# Altium PCB AICat V1.5 双面板 板厚1.6mm.PcbDoc (part 4 of 6)
Units mil, origin at the board's own origin, x right, y up, seen from the top; angles counter-clockwise.
Board outline 2778 x 2104 mil, 2 copper layers (Top Layer, Bottom Layer); 123 components, 84 nets, 332 pads, 256 vias.
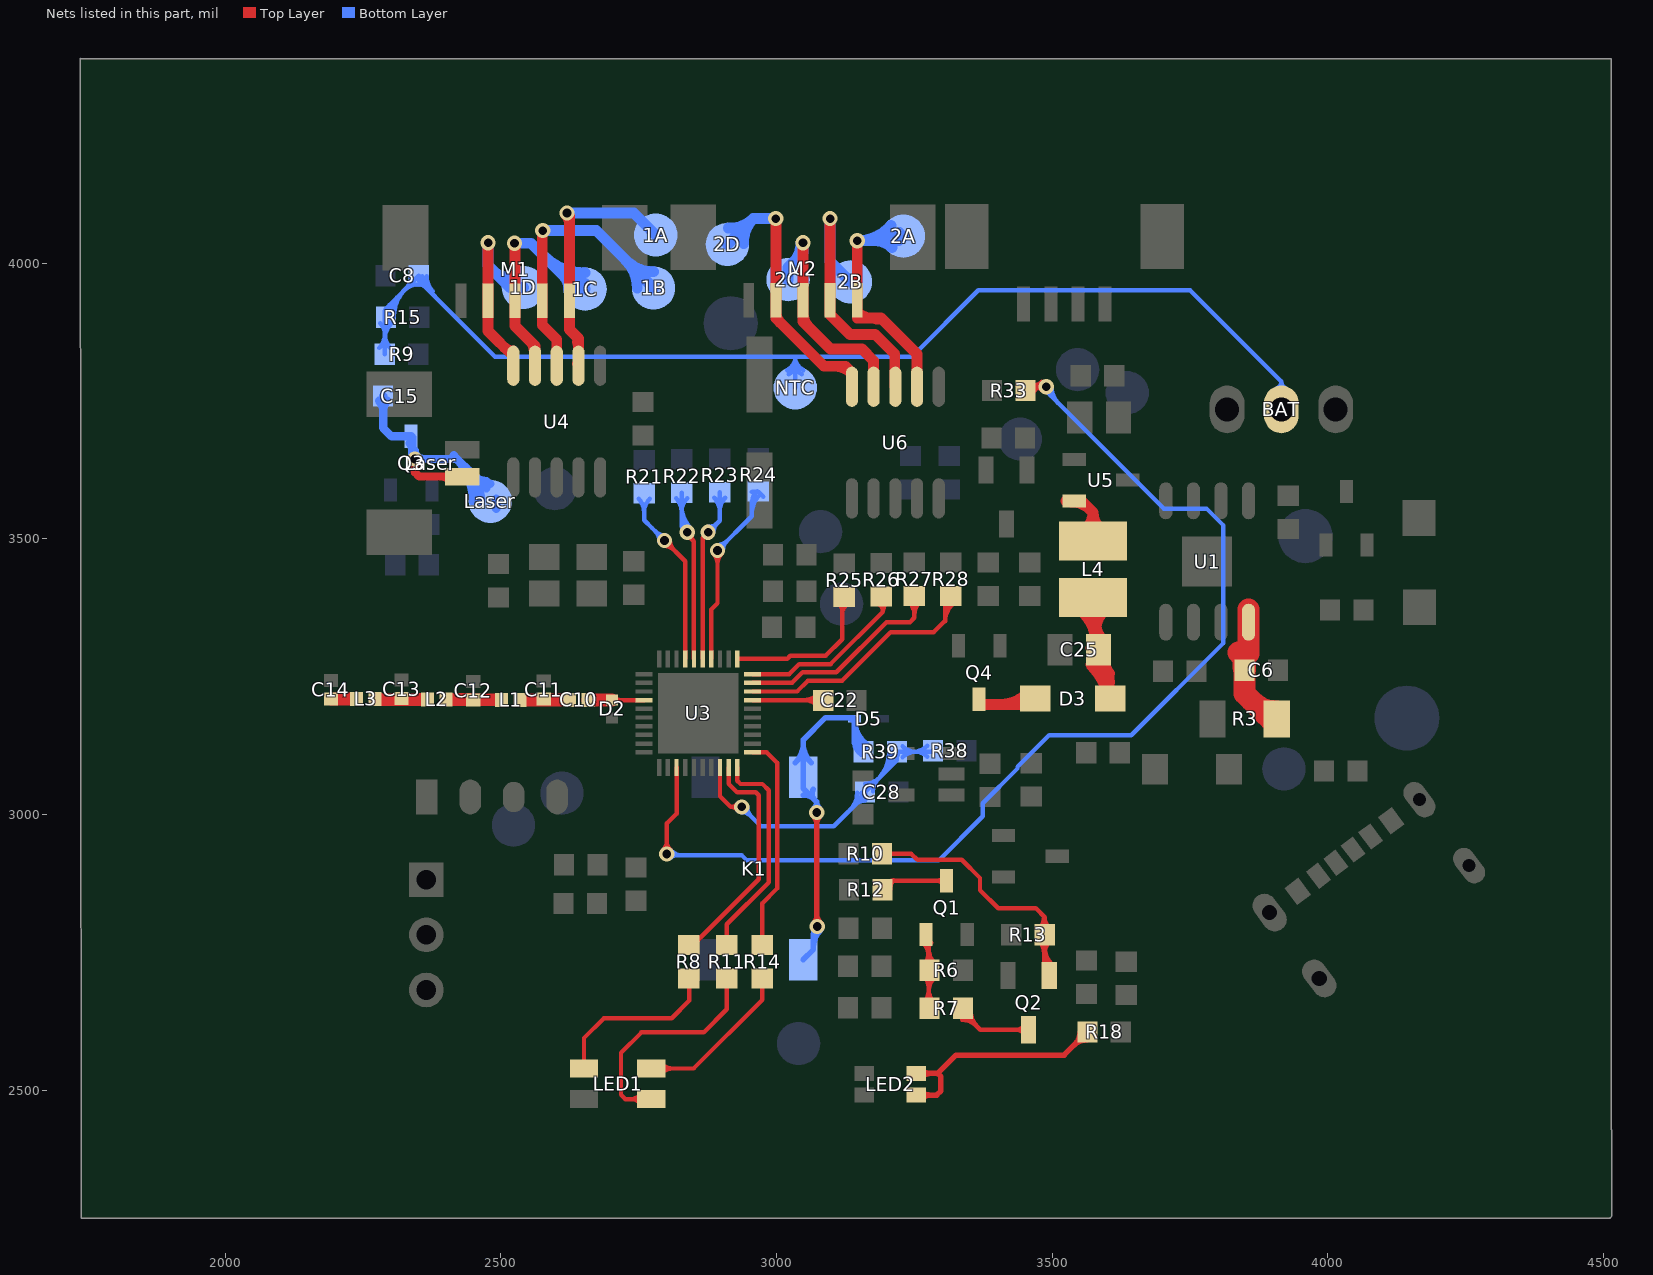
[diagram p4: the nets of this part, all layers, seen from the top]

## Via types
v1: diameter 27.56, hole 15.75, Top Layer to Bottom Layer, tented both sides, 256 vias

## Nets (pads, with @x,y where several pads share a name; then routed paths per layer and width w, separated by ;. In a path a pad name is that pad's centre, name@x,y a point inside that pad or via, vN(x,y) a via of type N, cw(c..) or ccw(c..) an arc to the next point about the centre after c; other vN are vias at no path point) (continued)
KEY: C28.2 R38.1 R39.2 U3.8 | length 1670.4
  Top Layer w8: U3.8@2897.52,3085.51 2897.52,3033.48 2917,3014 ; v1(2937,3014) 2917,3014 ; 2917,3014 cw(c2917,2998.44) v1@2929.28,3007.99 ; 2917,3014 ccw(c2917,3029.56) v1@2929.28,3020.01 ; 2917,3014 cw(c2917,2998.44) v1@2929.28,3007.99 ; 2917,3014 ccw(c2917,3029.56) v1@2929.28,3020.01 ; 2917,3014 ccw(c2917,3029.56) v1@2929.28,3020.01 ; 2917,3014 cw(c2917,2998.44) v1@2929.28,3007.99
  Bottom Layer w8: v1(2937,3014) 2972,2979 3104,2979 3160.69,3035.69 C28.2@3160.69,3041 3218.32,3098.63 R39.2@3218.32,3114 3281.69,3114 R38.1@3283.69,3116 ; 3133.2,3008.2 ccw(c3101.39,3040.02) C28.2@3146.38,3040.02 ; 3143.65,3018.65 cw(c3160.69,3001.62) C28.2@3160.69,3025.71 ; C28.2@3146.86,3021.86 ccw(c3128.7,3040.02) C28.2@3154.38,3040.02 ; v1@2937,3004.22 cw(c2937,2980.61) 2953.69,2997.31 ; v1@2937,3004.22 cw(c2937,2980.61) 2953.69,2997.31 ; v1@2937,3004.22 cw(c2937,2980.61) 2953.69,2997.31 ; v1@2946.78,3014 ccw(c2970.39,3014) 2953.69,2997.31 ; v1@2946.78,3014 ccw(c2970.39,3014) 2953.69,2997.31 ; v1@2946.78,3014 ccw(c2970.39,3014) 2953.69,2997.31 ; C28.2@3160.69,3056.29 ccw(c3160.69,3093.21) 3186.79,3067.1 ; C28.2@3160.69,3056.29 ccw(c3160.69,3093.21) 3186.79,3067.1 ; C28.2@3160.69,3056.29 ccw(c3160.69,3093.21) 3186.79,3067.1 ; C28.2@3174.99,3041.98 cw(c3207.16,3041.98) 3184.41,3064.73 ; C28.2@3174.99,3041.98 cw(c3207.16,3041.98) 3184.41,3064.73 ; C28.2@3174.99,3041.98 cw(c3207.16,3041.98) 3184.41,3064.73 ; 3183.72,3064.03 ccw(c3134.74,3113.02) R39.2@3204.01,3113.02 ; 3183.72,3064.03 ccw(c3134.74,3113.02) R39.2@3204.01,3113.02 ; 3183.72,3064.03 ccw(c3134.74,3113.02) R39.2@3204.01,3113.02 ; 3197.38,3077.69 ccw(c3162.05,3113.02) R39.2@3212.01,3113.02 ; 3197.38,3077.69 ccw(c3162.05,3113.02) R39.2@3212.01,3113.02 ; 3197.38,3077.69 ccw(c3162.05,3113.02) R39.2@3212.01,3113.02 ; 3211.03,3091.35 ccw(c3189.37,3113.02) R39.2@3220.01,3113.02 ; 3211.03,3091.35 ccw(c3189.37,3113.02) R39.2@3220.01,3113.02 ; 3211.03,3091.35 ccw(c3189.37,3113.02) R39.2@3220.01,3113.02 ; R39.2@3228.43,3103.88 cw(c3252.86,3079.46) 3252.86,3114 ; R39.2@3228.43,3103.88 cw(c3252.86,3079.46) 3252.86,3114 ; R39.2@3228.43,3103.88 cw(c3252.86,3079.46) 3252.86,3114 ; R39.2@3228.43,3124.12 ccw(c3252.86,3148.54) 3252.86,3114 ; R39.2@3228.43,3124.12 ccw(c3252.86,3148.54) 3252.86,3114 ; R39.2@3228.43,3124.12 ccw(c3252.86,3148.54) 3252.86,3114 ; 3246.69,3114 ccw(c3246.69,3152.01) R38.1@3273.57,3125.13 ; 3246.69,3114 ccw(c3246.69,3152.01) R38.1@3273.57,3125.13 ; 3246.69,3114 ccw(c3246.69,3152.01) R38.1@3273.57,3125.13 ; 3251.6,3114 cw(c3251.6,3082.93) R38.1@3273.57,3104.9 ; 3251.6,3114 cw(c3251.6,3082.93) R38.1@3273.57,3104.9 ; 3251.6,3114 cw(c3251.6,3082.93) R38.1@3273.57,3104.9 ; 3142.69,3017.69 cw(c3156.22,3017.69) 3149.64,3029.51 ccw(c3156.22,3017.69) 3142.69,3017.69
LED_B: R8.2 U3.9 | length 421.7
  Top Layer w8: R8.2@2841,2763.32 2848.32,2763.32 2968,2883 2968,3035 2962.44,3040.56 2928.44,3040.56 2913.27,3055.73 U3.9@2913.27,3085.51
LED_G: R11.2 U3.10 | length 398.6
  Top Layer w8: R11.2@2910,2765.32 2910,2801 2986,2877 2986,3044 2974.44,3055.56 2934.66,3055.56 2929.02,3061.2 U3.10@2929.02,3085.51
LED_R: R14.2 U3.11 | length 392.2
  Top Layer w8: U3.11@2956.55,3113.04 2981.96,3113.04 3001,3094 3001,2866 2974,2839 R14.2@2974,2765.32
LEIDA_CON: R33.2 U3.3 | length 3050.2
  Top Layer w8: v1(2801,2928.63) 2801,2984 2818.78,3001.78 U3.3@2818.78,3085.51 ; R33.2@3437.32,3777 3438.32,3778 v1@3488,3778 ; R33.2@3460.56,3778 cw(c3460.56,3747.56) v1@3482.08,3769.08 ; 3470.22,3778 ccw(c3470.22,3794.78) v1@3482.08,3782.92 ; v1@3486,3776 v1@3488,3778 ; v1@2794.08,2935.55 ccw(c2777.39,2952.24) 2801,2952.24 ; v1@2794.08,2935.55 ccw(c2777.39,2952.24) 2801,2952.24 ; v1@2794.08,2935.55 ccw(c2777.39,2952.24) 2801,2952.24 ; 2801,2952.24 ccw(c2824.61,2952.24) v1@2807.92,2935.55 ; 2801,2952.24 ccw(c2824.61,2952.24) v1@2807.92,2935.55 ; 2801,2952.24 ccw(c2824.61,2952.24) v1@2807.92,2935.55 ; R33.2@3447.29,3766.11 cw(c3471.63,3747.16) 3471.63,3778 ; R33.2@3447.29,3766.11 cw(c3471.63,3747.16) 3471.63,3778 ; R33.2@3447.29,3766.11 cw(c3471.63,3747.16) 3471.63,3778 ; R33.2@3453.6,3761.19 cw(c3488,3734.4) v1@3488,3778 ; R33.2@3453.6,3761.19 cw(c3488,3734.4) v1@3488,3778 ; R33.2@3453.6,3761.19 cw(c3488,3734.4) v1@3488,3778 ; R33.2@3464.39,3778 cw(c3464.39,3754.39) v1@3481.08,3771.08 ; R33.2@3464.39,3778 ccw(c3464.39,3801.61) v1@3481.08,3784.92 ; R33.2@3464.39,3778 cw(c3464.39,3754.39) v1@3481.08,3771.08 ; R33.2@3464.39,3778 ccw(c3464.39,3801.61) v1@3481.08,3784.92 ; R33.2@3464.39,3778 ccw(c3464.39,3801.61) v1@3481.08,3784.92 ; R33.2@3464.39,3778 cw(c3464.39,3754.39) v1@3481.08,3771.08 ; R33.2@3464.39,3778 ccw(c3464.39,3801.61) v1@3481.08,3784.92 ; R33.2@3464.39,3778 cw(c3464.39,3754.39) v1@3481.08,3771.08 ; v1@3488,3778 ccw(c3488,3751.01) 3464.02,3763.41 cw(c3488,3751.01) v1@3488,3778 ; R33.2@3456.92,3767.09 cw(c3474.85,3757.81) 3474.85,3778 ccw(c3474.85,3757.81) R33.2@3456.92,3767.09
  Bottom Layer w8: v1(2801,2928.63) 2803.63,2926 2937.32,2926 2946.32,2917 3294,2917 3374,2997 3374,3020.71 3437,3083.71 3437,3086.71 3494.29,3144 3643.32,3144 3809.78,3310.46 3809.78,3525 3779.78,3555 3702,3555 3488,3769 3488,3778 v1@3486,3776 ; v1@3490.78,3776 ccw(c3514.39,3776) 3497.69,3759.31 ; v1@3498.78,3776 ccw(c3541.7,3776) 3511.35,3745.65 ; v1@2807.92,2921.71 cw(c2818.26,2911.37) 2818.26,2926 ; v1@2807.92,2921.71 cw(c2818.26,2911.37) 2818.26,2926 ; v1@2807.92,2921.71 cw(c2818.26,2911.37) 2818.26,2926 ; v1@2807.92,2935.55 ccw(c2830.96,2958.59) 2830.96,2926 ; v1@2807.92,2935.55 ccw(c2830.96,2958.59) 2830.96,2926 ; v1@2807.92,2935.55 ccw(c2830.96,2958.59) 2830.96,2926 ; v1@3489.78,3778 ccw(c3515.8,3778) 3497.4,3759.6 ; v1@3489.78,3778 ccw(c3515.8,3778) 3497.4,3759.6 ; v1@3489.78,3778 ccw(c3515.8,3778) 3497.4,3759.6 ; v1@3489.78,3778 ccw(c3515.8,3778) 3497.4,3759.6 ; v1@3497.78,3778 ccw(c3543.12,3778) 3511.06,3745.94 ; v1@3497.78,3778 ccw(c3543.12,3778) 3511.06,3745.94 ; v1@3497.78,3778 ccw(c3543.12,3778) 3511.06,3745.94 ; v1@3497.78,3778 ccw(c3543.12,3778) 3511.06,3745.94
  other v1: 3489,3776
MOTORA_INA: R21.2 U3.27 | length 894.4
  Top Layer w8: v1(2797,3497) 2834.53,3459.47 2834.53,3305 ; U3.27@2834.53,3282.31 2834.53,3305 ; 2834.53,3319.53 2834.53,3305 ; v1@2797,3487.22 cw(c2797,3463.61) 2813.69,3480.31 ; v1@2797,3487.22 cw(c2797,3463.61) 2813.69,3480.31 ; v1@2797,3487.22 cw(c2797,3463.61) 2813.69,3480.31 ; v1@2797,3487.22 cw(c2797,3463.61) 2813.69,3480.31 ; v1@2797,3487.22 cw(c2797,3463.61) 2813.69,3480.31 ; v1@2806.78,3497 ccw(c2830.39,3497) 2813.69,3480.31 ; v1@2806.78,3497 ccw(c2830.39,3497) 2813.69,3480.31 ; v1@2806.78,3497 ccw(c2830.39,3497) 2813.69,3480.31 ; v1@2806.78,3497 ccw(c2830.39,3497) 2813.69,3480.31 ; v1@2806.78,3497 ccw(c2830.39,3497) 2813.69,3480.31
  Bottom Layer w8: v1@2787.24,3497.61 ccw(c2768.17,3498.81) 2781.68,3512.32 ; v1@2796.39,3506.76 cw(c2795.19,3525.83) 2781.68,3512.32 ; v1(2797,3497) 2781.68,3512.32 ; R21.2@2749.88,3572.57 cw(c2725.46,3548.14) 2760,3548.14 ; R21.2@2749.88,3572.57 cw(c2725.46,3548.14) 2760,3548.14 ; R21.2@2749.88,3572.57 cw(c2725.46,3548.14) 2760,3548.14 ; R21.2@2749.88,3572.57 cw(c2725.46,3548.14) 2760,3548.14 ; 2760,3548.14 cw(c2794.54,3548.14) R21.2@2770.12,3572.57 ; 2760,3548.14 cw(c2794.54,3548.14) R21.2@2770.12,3572.57 ; 2760,3548.14 cw(c2794.54,3548.14) R21.2@2770.12,3572.57 ; 2760,3548.14 cw(c2794.54,3548.14) R21.2@2770.12,3572.57 ; 2760,3548.14 2760,3534 2775,3519 2781.68,3512.32 ; 2780.31,3513.69 cw(c2763.61,3497) v1@2787.22,3497 ; 2780.31,3513.69 ccw(c2797,3530.39) v1@2797,3506.78 ; 2780.31,3513.69 cw(c2763.61,3497) v1@2787.22,3497 ; 2780.31,3513.69 ccw(c2797,3530.39) v1@2797,3506.78 ; 2780.31,3513.69 ccw(c2797,3530.39) v1@2797,3506.78 ; 2780.31,3513.69 cw(c2763.61,3497) v1@2787.22,3497 ; 2780.31,3513.69 ccw(c2797,3530.39) v1@2797,3506.78 ; 2780.31,3513.69 cw(c2763.61,3497) v1@2787.22,3497
MOTORA_INB: R22.2 U3.26 | length 745.5
  Top Layer w8: v1@2834,3512 2850.28,3495.72 U3.26@2850.28,3282.31 ; v1@2838,3502.22 cw(c2838,3488.27) 2847.87,3498.13 ; v1@2838,3502.22 cw(c2838,3488.27) 2847.87,3498.13 ; v1@2838,3502.22 cw(c2838,3488.27) 2847.87,3498.13 ; v1@2838,3502.22 cw(c2838,3488.27) 2847.87,3498.13 ; v1@2846.72,3507.56 ccw(c2854.27,3503.72) 2848.28,3497.72 ; v1@2846.72,3507.56 ccw(c2854.27,3503.72) 2848.28,3497.72 ; v1@2846.72,3507.56 ccw(c2854.27,3503.72) 2848.28,3497.72 ; v1@2846.72,3507.56 ccw(c2854.27,3503.72) 2848.28,3497.72
  Bottom Layer w8: 2828,3540.44 ccw(c2866.44,3540.44) v1@2839.26,3513.26 ; 2828,3559.75 ccw(c2885.75,3559.75) v1@2844.92,3518.92 ; R22.2@2828,3583.68 2828,3522 v1(2838,3512) ; R22.2@2817.88,3573.57 cw(c2793.46,3549.14) 2828,3549.14 ; R22.2@2817.88,3573.57 cw(c2793.46,3549.14) 2828,3549.14 ; R22.2@2817.88,3573.57 cw(c2793.46,3549.14) 2828,3549.14 ; R22.2@2817.88,3573.57 cw(c2793.46,3549.14) 2828,3549.14 ; R22.2@2817.88,3573.57 cw(c2793.46,3549.14) 2828,3549.14 ; 2828,3549.14 cw(c2862.54,3549.14) R22.2@2838.12,3573.57 ; 2828,3549.14 cw(c2862.54,3549.14) R22.2@2838.12,3573.57 ; 2828,3549.14 cw(c2862.54,3549.14) R22.2@2838.12,3573.57 ; 2828,3549.14 cw(c2862.54,3549.14) R22.2@2838.12,3573.57 ; 2828,3549.14 cw(c2862.54,3549.14) R22.2@2838.12,3573.57
MOTORA_INC: R23.2 U3.25 | length 588.4
  Top Layer w8: U3.25@2866.02,3282.31 2866.02,3469 ; 2866.02,3481.02 2866.02,3469 ; v1(2876,3512) 2866.02,3502.02 2866.02,3469
  Bottom Layer w8: v1(2876,3512) 2897,3533 R23.2@2897,3584.68 ; v1@2876,3521.78 ccw(c2876,3545.39) 2892.69,3528.69 ccw(c2909.39,3512) v1@2885.78,3512 ; R23.2@2886.88,3574.57 cw(c2862.46,3550.14) 2897,3550.14 cw(c2931.54,3550.14) R23.2@2907.12,3574.57 ; R23.2@2888.09,3573.49 cw(c2873.36,3555) 2897,3555 ; R23.2@2888.09,3573.49 cw(c2873.36,3555) 2897,3555 ; R23.2@2888.09,3573.49 cw(c2873.36,3555) 2897,3555 ; R23.2@2888.09,3573.49 cw(c2873.36,3555) 2897,3555 ; 2897,3555 cw(c2920.64,3555) R23.2@2905.91,3573.49 ; 2897,3555 cw(c2920.64,3555) R23.2@2905.91,3573.49 ; 2897,3555 cw(c2920.64,3555) R23.2@2905.91,3573.49 ; 2897,3555 cw(c2920.64,3555) R23.2@2905.91,3573.49
MOTORA_IND: R24.2 U3.24 | length 551.3
  Top Layer w8: U3.24@2881.77,3282.31 2881.77,3371.98 2893,3383.21 2893,3424 ; 2893,3443 2893,3424 ; v1(2893,3479) 2893,3424 ; 2893,3455.39 cw(c2916.61,3455.39) 2899.92,3472.08 ccw(c2916.61,3455.39) 2893,3455.39 ; 2893,3455.39 ccw(c2869.39,3455.39) 2886.08,3472.08 cw(c2869.39,3455.39) 2893,3455.39
  Bottom Layer w8: v1@2893,3488.78 ccw(c2893,3512.39) 2909.69,3495.69 ccw(c2926.39,3479) v1@2902.78,3479 ; 2905,3491 v1(2893,3479) 2955,3541 2955,3563.18 cw(c2988.52,3563.18) R24.2@2964.82,3586.88 ; 2955,3543.86 cw(c3007.84,3543.86) R24.2@2970.48,3581.22 ; R24.2@2955,3585 2955.68,3585.68 R24.2@2967,3585.68 R24.2@2976,3576.68
MOTORA_OUTA: 1A.1 M1.1 U4.7 | length 558.2
  Top Layer w15: U4.7@2637,3817.7 U4.7@2640.83,3813.88 ; 2637,3857.11 ccw(c2658.57,3857.11) U4.7@2643.32,3841.86 ; 2637,3857.11 ccw(c2658.57,3857.11) U4.7@2643.32,3841.86 ; 2637,3857.11 ccw(c2658.57,3857.11) U4.7@2643.32,3841.86
  Top Layer w19.68: v1(2620,4091) 2624.43,4086.57 M1.1@2624.43,3931.91 2624.43,3879.57 2640.83,3863.17 U4.7@2640.83,3813.88 ; v1@2617.22,4088.22 cw(c2599.81,4070.81) 2624.43,4070.81 ccw(c2599.81,4070.81) v1@2617.22,4088.22
  Bottom Layer w19.68: v1(2620,4091) 2741,4091 1A.1@2781,4051
MOTORA_OUTB: 1B.1 M1.2 U4.8 | length 725.4
  Top Layer w19.68: v1@2575.22,4058 M1.2@2575.22,3931.91 2575.22,3887.78 2601.46,3861.54 U4.8@2601.46,3813.88
  Bottom Layer w15: v1@2576,4058 2575,4058 v1(2576,4059)
  Bottom Layer w19.68: v1(2576,4059) 2673,4059 1B.1@2777,3955 ; 2726.59,4005.41 cw(c2676.19,3955) 2747.47,3955 ccw(c2676.19,3955) 2726.59,4005.41 ; 2726.59,4005.41 ccw(c2777,4055.81) 2777,3984.53 cw(c2777,4055.81) 2726.59,4005.41
MOTORA_OUTC: 1C.1 M1.3 U4.9 | length 842.1
  Top Layer w15: 2548.61,3863.39 cw(c2524.59,3839.37) U4.9@2558.56,3839.37 ; 2548.61,3863.39 cw(c2524.59,3839.37) U4.9@2558.56,3839.37 ; 2548.61,3863.39 cw(c2524.59,3839.37) U4.9@2558.56,3839.37
  Top Layer w19.68: v1@2526.01,4036 M1.3@2526.01,3931.91 2526.01,3885.99 2562.09,3849.91 U4.9@2562.09,3813.88 ; 2552.61,3859.39 cw(c2532.59,3839.37) 2560.9,3839.37 ccw(c2532.59,3839.37) 2552.61,3859.39
  Bottom Layer w15: v1(2525,4036) v1@2532.21,4036
  Bottom Layer w19.68: v1@2532.21,4036 2555,4036 2638,3953 1C.1@2653,3953 ; 2576.99,4014.01 ccw(c2653,4090.03) 2653,3982.53 cw(c2653,4090.03) 2576.99,4014.01 ; 2610.59,3980.41 ccw(c2653,4022.82) 2653,3962.84 cw(c2653,4022.82) 2610.59,3980.41 ; 2613.2,3977.8 cw(c2588.4,3953) 2623.47,3953 ccw(c2588.4,3953) 2613.2,3977.8
MOTORA_OUTD: 1D.1 M1.4 U4.10 | length 627.5
  Top Layer w8: 2473.78,3896.22 M1.4@2473.78,3924.91 ; 2473.79,3895.9 cw(c2484.03,3895.9) M1.4@2479.42,3905.04 ; 2473.79,3895.9 cw(c2484.03,3895.9) M1.4@2479.42,3905.04 ; 2473.79,3895.9 cw(c2484.03,3895.9) M1.4@2479.42,3905.04 ; 2473.79,3895.9 cw(c2484.03,3895.9) M1.4@2479.42,3905.04 ; 2473.79,3895.9 cw(c2484.03,3895.9) M1.4@2479.42,3905.04
  Top Layer w15: 2502.9,3851.1 ccw(c2522.72,3870.91) U4.10@2522.72,3842.89 ; 2502.9,3851.1 ccw(c2522.72,3870.91) U4.10@2522.72,3842.89 ; 2502.9,3851.1 ccw(c2522.72,3870.91) U4.10@2522.72,3842.89
  Top Layer w19.68: v1@2476.78,4037 M1.4@2476.78,3931.91 2476.78,3877.22 2522.72,3831.28 U4.10@2522.72,3813.88 ; 2506.9,3847.1 ccw(c2522.72,3862.91) 2522.72,3840.55 cw(c2522.72,3862.91) 2506.9,3847.1
  Bottom Layer w19.68: v1(2477,4037) 2477,3996 2517,3956 1D.1@2541,3956 ; 2489,3984 ccw(c2508.89,4003.89) 2524.56,3980.53 cw(c2508.89,4003.89) 2489,3984
MOTORB_INA: R25.2 U3.21 | length 495.9
  Top Layer w8: U3.21@2929.02,3282.31 3019.31,3282.31 3025,3288 3089,3288 3119,3318 3119,3362.86 ; 3118.93,3362.93 3119,3363 3119,3390.68 R25.2@3123,3394.68 ; R25.2@3111.9,3384.57 cw(c3094.76,3367.42) 3119,3367.42 ; R25.2@3111.9,3384.57 cw(c3094.76,3367.42) 3119,3367.42 ; R25.2@3111.9,3384.57 cw(c3094.76,3367.42) 3119,3367.42 ; R25.2@3111.9,3384.57 cw(c3094.76,3367.42) 3119,3367.42 ; R25.2@3111.9,3384.57 cw(c3094.76,3367.42) 3119,3367.42 ; 3119,3362.86 cw(c3142.59,3362.86) R25.2@3129.78,3382.67 ; 3119,3362.86 cw(c3142.59,3362.86) R25.2@3129.78,3382.67 ; 3119,3362.86 cw(c3142.59,3362.86) R25.2@3129.78,3382.67 ; 3119,3362.86 cw(c3142.59,3362.86) R25.2@3129.78,3382.67 ; 3119,3362.86 cw(c3142.59,3362.86) R25.2@3129.78,3382.67
MOTORB_INB: R26.2 U3.20 | length 501.8
  Top Layer w8: U3.20@2956.55,3254.78 2988.78,3254.78 3022.78,3254.78 3041,3273 3098,3273 3192.93,3367.93 ; R26.2@3190,3395.68 3193,3392.68 3193,3368 3192.93,3367.93 ; R26.2@3184.03,3383.18 cw(c3175.55,3367.93) 3193,3367.93 ; R26.2@3184.03,3383.18 cw(c3175.55,3367.93) 3193,3367.93 ; R26.2@3184.03,3383.18 cw(c3175.55,3367.93) 3193,3367.93 ; R26.2@3184.03,3383.18 cw(c3175.55,3367.93) 3193,3367.93 ; R26.2@3184.03,3383.18 cw(c3175.55,3367.93) 3193,3367.93 ; 3192.93,3367.93 3193,3367.93 ; 3193,3367.93 cw(c3216.18,3367.93) R26.2@3200.6,3385.09 ; 3193,3367.93 cw(c3216.18,3367.93) R26.2@3200.6,3385.09 ; 3193,3367.93 cw(c3216.18,3367.93) R26.2@3200.6,3385.09 ; 3193,3367.93 cw(c3216.18,3367.93) R26.2@3200.6,3385.09 ; 3193,3367.93 cw(c3216.18,3367.93) R26.2@3200.6,3385.09
MOTORB_INC: R27.2 U3.19 | length 653.3
  Top Layer w8: U3.19@2956.55,3239.03 3003.03,3239.03 3028.24,3239.03 3047.21,3258 3108.46,3258 3199.46,3349 3242,3349 3250,3357 R27.2@3250,3396.68 ; R27.2@3239.88,3386.57 cw(c3215.46,3362.14) 3250,3362.14 ; R27.2@3239.88,3386.57 cw(c3215.46,3362.14) 3250,3362.14 ; R27.2@3239.88,3386.57 cw(c3215.46,3362.14) 3250,3362.14 ; R27.2@3239.88,3386.57 cw(c3215.46,3362.14) 3250,3362.14 ; R27.2@3239.88,3386.57 cw(c3215.46,3362.14) 3250,3362.14 ; 3250,3362.14 cw(c3284.54,3362.14) R27.2@3260.12,3386.57 ; 3250,3362.14 cw(c3284.54,3362.14) R27.2@3260.12,3386.57 ; 3250,3362.14 cw(c3284.54,3362.14) R27.2@3260.12,3386.57 ; 3250,3362.14 cw(c3284.54,3362.14) R27.2@3260.12,3386.57 ; 3250,3362.14 cw(c3284.54,3362.14) R27.2@3260.12,3386.57
MOTORB_IND: R28.2 U3.18 | length 792.7
  Top Layer w8: U3.18@2956.55,3223.28 3017.28,3223.28 3037.28,3223.28 3057,3243 3118.91,3243 3206.91,3331 3285,3331 3305.9,3351.9 R28.2@3305.9,3397.43 ; 3305.9,3350.98 cw(c3347.89,3350.98) R28.2@3323.37,3385.07 ; 3305.9,3350.98 cw(c3347.89,3350.98) R28.2@3323.37,3385.07 ; 3305.9,3350.98 cw(c3347.89,3350.98) R28.2@3323.37,3385.07 ; 3305.9,3350.98 cw(c3347.89,3350.98) R28.2@3323.37,3385.07 ; 3305.9,3350.98 cw(c3347.89,3350.98) R28.2@3323.37,3385.07 ; 3305.9,3366.59 cw(c3336.66,3366.59) R28.2@3318.7,3391.56 ; 3305.9,3366.59 cw(c3336.66,3366.59) R28.2@3318.7,3391.56 ; 3305.9,3366.59 cw(c3336.66,3366.59) R28.2@3318.7,3391.56 ; 3305.9,3366.59 cw(c3336.66,3366.59) R28.2@3318.7,3391.56 ; 3305.9,3366.59 cw(c3336.66,3366.59) R28.2@3318.7,3391.56
MOTORB_OUTA: 2A.1 M2.1 U6.7 | length 899.4
  Top Layer w15: v1@3146,4041.15 v1(3146.43,4040.72) ; M2.1@3146.43,3932.91 M2.1@3146.43,3935.91 ; M2.1@3148.08,3912.92 ccw(c3188.92,3953.76) 3188.92,3896 ; M2.1@3148.08,3912.92 ccw(c3188.92,3953.76) 3188.92,3896 ; M2.1@3148.08,3912.92 ccw(c3188.92,3953.76) 3188.92,3896
  Top Layer w19.68: v1(3146.43,4040.72) M2.1@3146.43,3932.91 3146.43,3900.57 3189.43,3900.57 3254.83,3835.17 U6.7@3254.83,3775.88 ; M2.1@3146.43,3911.26 ccw(c3172.22,3937.06) 3172.22,3900.58 cw(c3172.22,3937.06) M2.1@3146.43,3911.26
  Bottom Layer w19.68: v1(3146.43,4040.72) 3221.72,4040.72 2A.1@3230,4049 ; v1(3146.43,4040.72) ccw(c3146.43,4122.47) 3207.82,4068.5 cw(c3146.43,4122.47) v1(3146.43,4040.72) ; 3178.69,4040.72 cw(c3178.69,3997.69) 3209.12,4028.12 ccw(c3178.69,3997.69) 3178.69,4040.72 ; 3189.95,4040.72 ccw(c3189.95,4084.21) 3222.61,4055.5 cw(c3189.95,4084.21) 3189.95,4040.72
MOTORB_OUTB: 2B.1 M2.2 U6.8 | length 514
  Top Layer w15: v1@3097,4081 v1(3097.22,4080.78) ; M2.2@3097.22,3932.91 M2.2@3097.22,3935.91
  Top Layer w19.68: v1(3097.22,4080.78) M2.2@3097.22,3932.91 3097.22,3906.87 3133.33,3870.76 3178.47,3870.76 3178.66,3870.95 3214.46,3835.15 3214.46,3776.88 U6.8@3215.46,3775.88
  Bottom Layer w19.68: v1(3097.22,4080.78) 3097.22,4002.78 2B.1@3134,3966
MOTORB_OUTC: 2C.1 M2.3 U6.9 | length 643.4
  Top Layer w15: M2.3@3048.01,3932.91 M2.3@3048.01,3935.91
  Top Layer w19.68: v1(3048.01,4036.99) M2.3@3048.01,3932.91 3048.01,3893.99 3097.93,3844.07 3154.93,3844.07 3176.09,3822.91 U6.9@3176.09,3775.88 ; M2.3@3048.01,3911.26 ccw(c3089.69,3911.26) 3060.21,3881.79 cw(c3089.69,3911.26) M2.3@3048.01,3911.26
  Bottom Layer w19.68: 2C.1@3021,3970 3021,3992 3048.01,4019.01 ; v1(3048.01,4036.99) 3048.01,4019.01 ; 3048,4019 ccw(c3065.72,4001.29) 3045.19,3986.93 cw(c3065.72,4001.29) 3048,4019 ; 2C.1@3030,4001 ccw(c2995.94,4035.06) 3044.07,4036.85 cw(c2995.94,4035.06) 2C.1@3030,4001
MOTORB_OUTD: 2D.1 M2.4 U6.10 | length 822.5
  Top Layer w15: M2.4@2998.78,3913.81 M2.4@2998.78,3932.91 M2.4@2998.78,3935.91 ; v1(2998.78,4080.78) v1@2999,4081
  Top Layer w19.68: v1(2998.78,4080.78) M2.4@2998.78,3932.91 2998.78,3913.81 2998.78,3900.22 3086,3813 3125,3813 3136.72,3801.28 U6.10@3136.72,3775.88 ; M2.4@2998.78,3911.26 ccw(c3025.45,3911.26) 3006.6,3892.4 cw(c3025.45,3911.26) M2.4@2998.78,3911.26 ; 3105.78,3813 cw(c3105.78,3770.43) 3135.88,3800.53 ccw(c3105.78,3770.43) 3105.78,3813
  Bottom Layer w19.68: 2D.1@2911,4034 2957.78,4080.78 ; v1(2998.78,4080.78) 2957.78,4080.78 ; 2957.78,4080.78 cw(c2915.81,4122.75) 2912.6,4063.48 ccw(c2915.81,4122.75) 2957.78,4080.78 ; 2957.78,4080.78 ccw(c2999.75,4038.81) 2940.48,4035.6 cw(c2999.75,4038.81) 2957.78,4080.78
NetANT1_1: C14.2 L3.2 | length 46.6
  Top Layer w19.68: L3.2@2237.54,3209.27 L3.2@2238.27,3210
  Top Layer w23.2: C14.2@2192.73,3209.6 L3.2@2238.27,3209.6
NetBAT1_2: BAT.2 C8.1 NTC.1 R9.1 R15.2 | length 3870.6
  Bottom Layer w8: R9.1@2289.69,3835 2289.69,3914.05 R15.2@2290.68,3915.05 ; R15.2@2291.68,3902 2291.68,3917.37 C8.1@2351.32,3977 2351.32,3968.68 2489.53,3830.47 3033,3830.47 ; 2372.93,3952.76 ccw(c2351.32,3931.14) C8.1@2351.32,3961.71 ; 2376.9,3948.78 cw(c2404.14,3976.02) C8.1@2365.62,3976.02 ; NTC.1@3034,3774 3034,3829.47 ; BAT.2@3907.86,3759.18 ccw(c3904.63,3769.53) 3915.47,3769.53 ccw(c3926.31,3769.53) BAT.2@3923.08,3759.18 ; BAT.2@3915.47,3734.81 3915.47,3785.53 ; R9.1@2279.57,3846.1 ccw(c2255.15,3870.52) 2289.69,3870.52 ; R9.1@2279.57,3846.1 ccw(c2255.15,3870.52) 2289.69,3870.52 ; R9.1@2279.57,3846.1 ccw(c2255.15,3870.52) 2289.69,3870.52 ; R9.1@2279.57,3846.1 ccw(c2255.15,3870.52) 2289.69,3870.52 ; R9.1@2279.57,3846.1 ccw(c2255.15,3870.52) 2289.69,3870.52 ; R15.2@2281.57,3890.9 cw(c2261.97,3871.3) 2289.69,3871.3 ; R15.2@2281.57,3890.9 cw(c2261.97,3871.3) 2289.69,3871.3 ; R15.2@2281.57,3890.9 cw(c2261.97,3871.3) 2289.69,3871.3 ; R15.2@2281.57,3890.9 cw(c2261.97,3871.3) 2289.69,3871.3 ; R15.2@2281.57,3890.9 cw(c2261.97,3871.3) 2289.69,3871.3 ; 2289.69,3861.65 cw(c2331.05,3861.65) R15.2@2301.8,3890.9 ; 2289.69,3861.65 cw(c2331.05,3861.65) R15.2@2301.8,3890.9 ; 2289.69,3861.65 cw(c2331.05,3861.65) R15.2@2301.8,3890.9 ; 2289.69,3861.65 cw(c2331.05,3861.65) R15.2@2301.8,3890.9 ; 2289.69,3861.65 cw(c2331.05,3861.65) R15.2@2301.8,3890.9 ; 2289.69,3870.52 ccw(c2324.23,3870.52) R9.1@2299.8,3846.1 ; 2289.69,3870.52 ccw(c2324.23,3870.52) R9.1@2299.8,3846.1 ; 2289.69,3870.52 ccw(c2324.23,3870.52) R9.1@2299.8,3846.1 ; 2289.69,3870.52 ccw(c2324.23,3870.52) R9.1@2299.8,3846.1 ; 2289.69,3870.52 ccw(c2324.23,3870.52) R9.1@2299.8,3846.1 ; 2289.69,3880.97 cw(c2311.73,3880.97) R15.2@2296.14,3896.56 ; 2289.69,3880.97 cw(c2311.73,3880.97) R15.2@2296.14,3896.56 ; 2289.69,3880.97 cw(c2311.73,3880.97) R15.2@2296.14,3896.56 ; 2289.69,3880.97 cw(c2311.73,3880.97) R15.2@2296.14,3896.56 ; 2289.69,3880.97 cw(c2311.73,3880.97) R15.2@2296.14,3896.56 ; R15.2@2289.99,3902.98 cw(c2320.63,3902.98) 2298.96,3924.65 ; R15.2@2289.99,3902.98 cw(c2320.63,3902.98) 2298.96,3924.65 ; R15.2@2289.99,3902.98 cw(c2320.63,3902.98) 2298.96,3924.65 ; R15.2@2289.99,3902.98 cw(c2320.63,3902.98) 2298.96,3924.65 ; R15.2@2297.99,3902.98 cw(c2347.94,3902.98) 2312.62,3938.31 ; R15.2@2297.99,3902.98 cw(c2347.94,3902.98) 2312.62,3938.31 ; R15.2@2297.99,3902.98 cw(c2347.94,3902.98) 2312.62,3938.31 ; R15.2@2297.99,3902.98 cw(c2347.94,3902.98) 2312.62,3938.31 ; R15.2@2305.99,3902.98 cw(c2375.26,3902.98) 2326.28,3951.96 ; R15.2@2305.99,3902.98 cw(c2375.26,3902.98) 2326.28,3951.96 ; R15.2@2305.99,3902.98 cw(c2375.26,3902.98) 2326.28,3951.96 ; R15.2@2305.99,3902.98 cw(c2375.26,3902.98) 2326.28,3951.96 ; 2325.21,3950.9 cw(c2351.32,3924.79) C8.1@2351.32,3961.71 ; 2325.21,3950.9 cw(c2351.32,3924.79) C8.1@2351.32,3961.71 ; 2325.21,3950.9 cw(c2351.32,3924.79) C8.1@2351.32,3961.71 ; 2325.21,3950.9 cw(c2351.32,3924.79) C8.1@2351.32,3961.71 ; 2327.59,3953.27 ccw(c2304.84,3976.02) C8.1@2337.01,3976.02 ; 2327.59,3953.27 ccw(c2304.84,3976.02) C8.1@2337.01,3976.02 ; 2327.59,3953.27 ccw(c2304.84,3976.02) C8.1@2337.01,3976.02 ; 2327.59,3953.27 ccw(c2304.84,3976.02) C8.1@2337.01,3976.02 ; C8.1@2351.32,3961.71 cw(c2351.32,3944.87) 2363.22,3956.78 ccw(c2351.32,3944.87) C8.1@2351.32,3961.71 ; C8.1@2365.62,3976.02 ccw(c2417.86,3976.02) 2380.92,3939.08 cw(c2417.86,3976.02) C8.1@2365.62,3976.02 ; 3033,3830.47 3245.47,3830.47 3366,3951 3750,3951 3915.47,3785.53 ; 3033,3830.47 3034,3829.47 ; 3034,3816.92 cw(c3014.03,3816.92) 3022.45,3798.82 ccw(c3014.03,3816.92) 3034,3816.92 ; 3034,3816.92 ccw(c3053.97,3816.92) 3045.55,3798.82 cw(c3053.97,3816.92) 3034,3816.92 ; 3034,3829.47 cw(c3008.19,3829.47) 3019.08,3806.07 ccw(c3008.19,3829.47) 3034,3829.47 ; 3034,3829.47 ccw(c3059.81,3829.47) 3048.92,3806.07 cw(c3059.81,3829.47) 3034,3829.47 ; 3915.47,3785.53 cw(c3901.7,3785.53) 3906.29,3772.55 ccw(c3901.7,3785.53) 3915.47,3785.53 ; 3915.47,3785.53 ccw(c3929.24,3785.53) 3924.65,3772.55 cw(c3929.24,3785.53) 3915.47,3785.53 ; C8.1@2357.62,3976.02 ccw(c2390.55,3976.02) 2367.27,3952.73 cw(c2390.55,3976.02) C8.1@2357.62,3976.02
NetC6_2: C6.2 R3.1 U1.4 | length 803.1
  Top Layer w39.37: U1.4@3856,3317 U1.4@3856,3349 ; U1.4@3856,3372 U1.4@3856,3349 ; R3.1@3884.69,3183.06 3894.23,3173.52 3848.69,3219.06 C6.2@3848.69,3262 3848.69,3283.31 3848,3284 3856,3292 ; 3837.84,3294.16 cw(c3808.24,3264.57) C6.2@3850.06,3262.93 ; 3837.84,3294.16 cw(c3808.24,3264.57) C6.2@3850.06,3262.93 ; 3837.84,3294.16 cw(c3808.24,3264.57) C6.2@3850.06,3262.93 ; 3837.84,3294.16 cw(c3808.24,3264.57) C6.2@3850.06,3262.93 ; 3837.84,3294.16 cw(c3808.24,3264.57) C6.2@3850.06,3262.93 ; C6.2@3847.34,3262.7 cw(c3878.62,3269.38) 3856,3292 ; C6.2@3847.34,3262.7 cw(c3878.62,3269.38) 3856,3292 ; C6.2@3847.34,3262.7 cw(c3878.62,3269.38) 3856,3292 ; C6.2@3847.34,3262.7 cw(c3878.62,3269.38) 3856,3292 ; C6.2@3847.34,3262.7 cw(c3878.62,3269.38) 3856,3292 ; 3856,3292 U1.4@3856,3349 ; 3861.48,3206.27 ccw(c3907.23,3252.01) R3.1@3907.23,3187.32 ; 3861.48,3206.27 ccw(c3907.23,3252.01) R3.1@3907.23,3187.32 ; 3861.48,3206.27 ccw(c3907.23,3252.01) R3.1@3907.23,3187.32 ; 3870.67,3197.07 ccw(c3894.23,3220.63) 3894.23,3187.32 cw(c3894.23,3220.63) 3870.67,3197.07
NetC10_1: C10.1 D2.1 U3.34 | length 214.9
  Top Layer w8: D2.1@2701.85,3208.05 2702.37,3207.53 U3.34@2759.75,3207.53 ; D2.1@2706.95,3203.85 cw(c2715.84,3194.96) 2715.84,3207.53 ; D2.1@2706.95,3203.85 cw(c2715.84,3194.96) 2715.84,3207.53 ; D2.1@2706.95,3203.85 cw(c2715.84,3194.96) 2715.84,3207.53 ; D2.1@2706.95,3203.85 cw(c2715.84,3194.96) 2715.84,3207.53 ; D2.1@2706.95,3203.85 cw(c2715.84,3194.96) 2715.84,3207.53 ; D2.1@2706.95,3212.26 ccw(c2718.35,3223.66) 2718.35,3207.53 ; D2.1@2706.95,3212.26 ccw(c2718.35,3223.66) 2718.35,3207.53 ; D2.1@2706.95,3212.26 ccw(c2718.35,3223.66) 2718.35,3207.53 ; D2.1@2706.95,3212.26 ccw(c2718.35,3223.66) 2718.35,3207.53 ; D2.1@2706.95,3212.26 ccw(c2718.35,3223.66) 2718.35,3207.53
  Top Layer w23.2: C10.1@2657.78,3208.05 D2.1@2701.85,3208.05
NetC10_2: C10.2 C11.2 L1.1 | length 80.9
  Top Layer w19.68: C11.2@2576.73,3208 C11.2@2578,3209.27 ; C10.2@2623,3209.27 C10.2@2624.27,3208
  Top Layer w23.2: 2547,3208 C10.2@2624.27,3208
NetC12_2: C12.2 L1.2 L2.1 | length 90.9
  Top Layer w19.68: L1.2@2498,3208.27 L1.2@2501.27,3205
  Top Layer w23.2: 2414,3209 C12.2@2449.27,3209 ; C12.2@2450,3208.27 L1.2@2501,3208.27
NetC13_2: C13.2 L2.2 L3.1 | length 94.9
  Top Layer w19.68: C13.2@2319.73,3210 C13.2@2320,3210.27
  Top Layer w23.2: L3.1@2272.73,3209 L2.2@2367.27,3209
NetC15_1: C15.1 Laser.1@2481,3568 Laser.2 Q3.3 | length 1369.7
  Top Layer w15: v1(2344,3645) 2344,3621 2352,3613 2429.48,3613 Laser.2@2430.09,3612.39 ; v1@2339.56,3640.56 cw(c2328.84,3629.84) 2344,3629.84 ; v1@2339.56,3640.56 cw(c2328.84,3629.84) 2344,3629.84 ; v1@2339.56,3640.56 cw(c2328.84,3629.84) 2344,3629.84 ; v1@2339.56,3640.56 cw(c2328.84,3629.84) 2344,3629.84 ; v1@2339.56,3640.56 cw(c2328.84,3629.84) 2344,3629.84 ; 2344,3629.84 cw(c2359.16,3629.84) v1@2348.44,3640.56 ; 2344,3629.84 cw(c2359.16,3629.84) v1@2348.44,3640.56 ; 2344,3629.84 cw(c2359.16,3629.84) v1@2348.44,3640.56 ; 2344,3629.84 cw(c2359.16,3629.84) v1@2348.44,3640.56 ; 2344,3629.84 cw(c2359.16,3629.84) v1@2348.44,3640.56 ; 2392.96,3613 cw(c2392.96,3591.02) Laser.2@2408.5,3606.56 ; 2392.96,3613 cw(c2392.96,3591.02) Laser.2@2408.5,3606.56 ; 2392.96,3613 cw(c2392.96,3591.02) Laser.2@2408.5,3606.56 ; 2392.96,3613 cw(c2392.96,3591.02) Laser.2@2408.5,3606.56 ; 2392.96,3613 cw(c2392.96,3591.02) Laser.2@2408.5,3606.56 ; 2395.89,3613 ccw(c2395.89,3630.85) Laser.2@2408.5,3618.23 ; 2395.89,3613 ccw(c2395.89,3630.85) Laser.2@2408.5,3618.23 ; 2395.89,3613 ccw(c2395.89,3630.85) Laser.2@2408.5,3618.23 ; 2395.89,3613 ccw(c2395.89,3630.85) Laser.2@2408.5,3618.23 ; 2395.89,3613 ccw(c2395.89,3630.85) Laser.2@2408.5,3618.23
  Bottom Layer w15: C15.1@2286.68,3759 2286.68,3701.32 2302.06,3685.94 Q3.3@2337.52,3685.94 2339.56,3683.9 v1@2339.56,3649.44 ; Q3.3@2334.47,3673.64 cw(c2322.19,3661.35) 2339.56,3661.35 ; Q3.3@2339.56,3670.88 ccw(c2369.88,3670.88) v1@2348.44,3649.44 ; v1(2344,3645) 2421,3645 Laser.1@2474,3592 ; 2414.57,3651.43 cw(c2331.15,3568) Laser.1@2449.13,3568 ; 2435.34,3630.66 cw(c2382.44,3577.76) Laser.1@2457.15,3573.88 ; 2440.18,3625.82 cw(c2382.36,3568) Laser.1@2464.13,3568 ; 2452.03,3613.97 ccw(c2474,3635.94) Laser.1@2474,3604.87 ; 2455.62,3610.38 ccw(c2481,3635.77) Laser.1@2481,3599.87 ; Laser.1@2492,3554 Laser.1@2492,3573 ; C15.1@2279.04,3750.37 cw(c2260.59,3731.93) 2286.68,3731.93 ; C15.1@2279.04,3750.37 cw(c2260.59,3731.93) 2286.68,3731.93 ; C15.1@2279.04,3750.37 cw(c2260.59,3731.93) 2286.68,3731.93 ; C15.1@2279.04,3750.37 cw(c2260.59,3731.93) 2286.68,3731.93 ; C15.1@2279.04,3750.37 cw(c2260.59,3731.93) 2286.68,3731.93 ; 2286.68,3731.93 cw(c2312.77,3731.93) C15.1@2294.33,3750.37 ; 2286.68,3731.93 cw(c2312.77,3731.93) C15.1@2294.33,3750.37 ; 2286.68,3731.93 cw(c2312.77,3731.93) C15.1@2294.33,3750.37 ; 2286.68,3731.93 cw(c2312.77,3731.93) C15.1@2294.33,3750.37 ; 2286.68,3731.93 cw(c2312.77,3731.93) C15.1@2294.33,3750.37 ; v1@2339.56,3649.44 ccw(c2328.84,3660.16) 2344,3660.16 ; v1@2339.56,3649.44 ccw(c2328.84,3660.16) 2344,3660.16 ; v1@2339.56,3649.44 ccw(c2328.84,3660.16) 2344,3660.16 ; v1@2339.56,3649.44 ccw(c2328.84,3660.16) 2344,3660.16 ; 2344,3660.16 ccw(c2359.16,3660.16) v1@2348.44,3649.44 ; 2344,3660.16 ccw(c2359.16,3660.16) v1@2348.44,3649.44 ; 2344,3660.16 ccw(c2359.16,3660.16) v1@2348.44,3649.44 ; 2344,3660.16 ccw(c2359.16,3660.16) v1@2348.44,3649.44 ; v1@2348.44,3649.44 ccw(c2359.16,3660.16) 2359.16,3645 ; v1@2348.44,3649.44 ccw(c2359.16,3660.16) 2359.16,3645 ; 2359.16,3645 ccw(c2359.16,3629.84) 2348.44,3640.56 cw(c2359.16,3629.84) 2359.16,3645
NetC22_2: C22.2 U3.17 | length 302.8
  Top Layer w8: U3.17@2956.55,3207.53 3083.22,3207.53 C22.2@3092.69,3217 ; 3055.05,3207.53 ccw(c3055.05,3243.62) C22.2@3080.57,3218.1 ; 3057.24,3207.53 cw(c3057.24,3174.54) C22.2@3080.57,3197.87 ; 3049.05,3207.53 ccw(c3049.05,3243.62) 3074.57,3218.1 cw(c3049.05,3243.62) 3049.05,3207.53 ; 3051.24,3207.53 cw(c3051.24,3174.54) 3074.57,3197.87 ccw(c3051.24,3174.54) 3051.24,3207.53
NetC25_1: C25.1 D3.2 L4.1 | length 1131.5
  Top Layer w20: L4.1@3556.02,3366.72 cw(c3500.43,3311.14) C25.1@3579.04,3311.14 ; C25.1@3569.96,3271.82 cw(c3489.15,3191) D3.2@3601.73,3210.71 ; C25.1@3569.96,3302.18 ccw(c3548.05,3324.09) 3579.04,3324.09 ccw(c3610.03,3324.09) C25.1@3588.12,3302.18 ; 3579.04,3268.06 cw(c3579.04,3239.24) 3599.42,3259.62 ; 3579.04,3335.47 cw(c3623.23,3335.47) L4.1@3591.98,3366.72 ; L4.1@3580,3384.7 3579.04,3383.74 3579.04,3280 3603.44,3255.6 ; C25.1@3584.11,3285.96 cw(c3537.43,3239.29) 3603.44,3239.29 ; C25.1@3591.87,3280.9 ccw(c3625.03,3280.9) 3601.58,3257.46 ; D3.2@3592.87,3206.17 ccw(c3567.36,3231.68) D3.2@3603.44,3231.68 ; D3.2@3603.44,3227.16 ccw(c3633.13,3227.16) D3.2@3612.14,3206.17 ; L4.1@3556.02,3375.72 cw(c3500.43,3320.14) C25.1@3579.04,3320.14 ; L4.1@3556.02,3375.72 cw(c3500.43,3320.14) C25.1@3579.04,3320.14 ; L4.1@3556.02,3375.72 cw(c3500.43,3320.14) C25.1@3579.04,3320.14 ; L4.1@3556.02,3375.72 cw(c3500.43,3320.14) C25.1@3579.04,3320.14 ; 3579.04,3344.47 cw(c3623.23,3344.47) L4.1@3591.98,3375.72 ; 3579.04,3344.47 cw(c3623.23,3344.47) L4.1@3591.98,3375.72 ; 3579.04,3344.47 cw(c3623.23,3344.47) L4.1@3591.98,3375.72 ; 3579.04,3344.47 cw(c3623.23,3344.47) L4.1@3591.98,3375.72 ; 3579.04,3348.16 ccw(c3627.1,3348.16) C25.1@3593.12,3314.18 ; 3579.04,3348.16 ccw(c3627.1,3348.16) C25.1@3593.12,3314.18 ; 3579.04,3348.16 ccw(c3627.1,3348.16) C25.1@3593.12,3314.18 ; 3579.04,3348.16 ccw(c3627.1,3348.16) C25.1@3593.12,3314.18 ; C25.1@3593.76,3284.51 ccw(c3604.87,3274.93) 3594.49,3264.55 ; C25.1@3593.76,3284.51 ccw(c3604.87,3274.93) 3594.49,3264.55 ; C25.1@3593.76,3284.51 ccw(c3604.87,3274.93) 3594.49,3264.55 ; C25.1@3593.76,3284.51 ccw(c3604.87,3274.93) 3594.49,3264.55
NetD3_1: D3.1 Q4.3 | length 335.8
  Top Layer w20: Q4.3@3372.52,3200.06 D3.1@3476.3,3200.06 ; D3.1@3441.52,3200.06 ccw(c3441.52,3220.9) D3.1@3456.26,3206.17 ; 3406.72,3200.06 ccw(c3406.72,3268.7) D3.1@3455.26,3220.17 ; 3406.72,3200.06 ccw(c3406.72,3268.7) D3.1@3455.26,3220.17 ; 3406.72,3200.06 ccw(c3406.72,3268.7) D3.1@3455.26,3220.17 ; 3406.72,3200.06 ccw(c3406.72,3268.7) D3.1@3455.26,3220.17
NetD5_2: D5.2 K1.3 K1.4 R39.1 | length 1698.8
  Top Layer w10: v1(3073,3004) 3073,2800 v1@3074,2799 ; v1@3066.79,2997.79 cw(c3051.8,2982.8) 3073,2982.8 ; v1@3066.79,2997.79 cw(c3051.8,2982.8) 3073,2982.8 ; v1@3066.79,2997.79 cw(c3051.8,2982.8) 3073,2982.8 ; v1@3067.79,2803.21 ccw(c3055.22,2815.78) 3073,2815.78 ; v1@3067.79,2803.21 ccw(c3055.22,2815.78) 3073,2815.78 ; v1@3067.79,2803.21 ccw(c3055.22,2815.78) 3073,2815.78 ; 3073,2820.61 ccw(c3097.61,2820.61) v1@3080.21,2803.21 ; 3073,2820.61 ccw(c3097.61,2820.61) v1@3080.21,2803.21 ; 3073,2820.61 ccw(c3097.61,2820.61) v1@3080.21,2803.21 ; 3073,2982.8 cw(c3094.2,2982.8) v1@3079.21,2997.79 ; 3073,2982.8 cw(c3094.2,2982.8) v1@3079.21,2997.79 ; 3073,2982.8 cw(c3094.2,2982.8) v1@3079.21,2997.79
  Bottom Layer w10: K1.4@3048.48,2736.9 3067,2755.42 3067,2781 3074,2788 v1(3074,2797) ; v1(3073,3004) 3073,3023 ; 3123.41,3176 3113,3176 ; 3126.82,3176 cw(c3126.82,3164.13) D5.2@3135.21,3172.52 ; R39.1@3157.69,3114 3141.41,3130.28 D5.2@3141.41,3174 ; K1.3@3033.92,3093.97 ccw(c2998.77,3129.12) 3048.48,3129.12 ; K1.3@3033.92,3093.97 ccw(c2998.77,3129.12) 3048.48,3129.12 ; K1.3@3033.92,3093.97 ccw(c2998.77,3129.12) 3048.48,3129.12 ; 3048.48,3129.12 ccw(c3098.19,3129.12) K1.3@3063.04,3093.97 ; 3048.48,3129.12 ccw(c3098.19,3129.12) K1.3@3063.04,3093.97 ; 3048.48,3129.12 ccw(c3098.19,3129.12) K1.3@3063.04,3093.97 ; 3068.87,3027.13 cw(c3079.73,3038) 3066.38,3045.6 ccw(c3079.73,3038) 3068.87,3027.13 ; 3068.86,3027.14 ccw(c3049.38,3007.65) 3048.87,3035.2 cw(c3049.38,3007.65) 3068.86,3027.14 ; 3073,3023 cw(c3056.83,3023) 3067.31,3010.69 ccw(c3056.83,3023) 3073,3023 ; 3073,3023 ccw(c3089.17,3023) 3078.69,3010.69 cw(c3089.17,3023) 3073,3023 ; 3073,3023 3048.48,3047.52 K1.3@3048.48,3067.6 3048.48,3135.48 3089,3176 3113,3176 ; 3113,3176 3139.41,3176 D5.2@3141.41,3174 ; 3141.41,3134.1 ccw(c3171.96,3134.1) R39.1@3153.68,3109.62 ; 3141.41,3134.1 ccw(c3171.96,3134.1) R39.1@3153.68,3109.62 ; 3141.41,3134.1 ccw(c3171.96,3134.1) R39.1@3153.68,3109.62 ; 3141.41,3154.05 ccw(c3186.86,3154.05) R39.1@3159.66,3117.63 ; 3141.41,3154.05 ccw(c3186.86,3154.05) R39.1@3159.66,3117.63 ; 3141.41,3154.05 ccw(c3186.86,3154.05) R39.1@3159.66,3117.63 ; D5.2@3141.41,3174 ccw(c3201.75,3174) R39.1@3165.65,3125.65 ; D5.2@3141.41,3174 ccw(c3201.75,3174) R39.1@3165.65,3125.65 ; D5.2@3141.41,3174 ccw(c3201.75,3174) R39.1@3165.65,3125.65 ; K1.4@3067,2758.9 cw(c3112.1,2758.9) 3080.21,2790.79 ccw(c3112.1,2758.9) K1.4@3067,2758.9 ; 3067,2779.54 cw(c3075.77,2779.54) 3074.89,2788.27 ccw(c3075.77,2779.54) 3067,2779.54 ; 3067,2783.05 cw(c3087.95,2783.05) 3073.14,2797.86 ccw(c3087.95,2783.05) 3067,2783.05
NetL4_2: L4.2 U5.2 | length 722.7
  Top Layer w20: U5.2@3524.81,3569 3553,3569 3574,3548 ; L4.2@3556.16,3505.42 ccw(c3514.28,3548) 3574,3548 ; L4.2@3574,3487.3 L4.2@3574,3493.3 ; L4.2@3580,3487.3 L4.2@3574,3493.3 ; L4.2@3591.84,3505.42 cw(c3633.72,3548) 3574,3548 ; U5.2@3533.95,3567.31 cw(c3533.95,3517.22) 3569.36,3552.64 ; U5.2@3533.95,3567.31 cw(c3533.95,3517.22) 3569.36,3552.64 ; U5.2@3533.95,3567.31 cw(c3533.95,3517.22) 3569.36,3552.64 ; U5.2@3534.38,3567.36 cw(c3541.49,3538.55) 3562.47,3559.53 ; U5.2@3534.38,3567.36 cw(c3541.49,3538.55) 3562.47,3559.53 ; U5.2@3534.38,3567.36 cw(c3541.49,3538.55) 3562.47,3559.53 ; L4.2@3558.48,3516.44 ccw(c3534.16,3548) 3574,3548 ; L4.2@3558.48,3516.44 ccw(c3534.16,3548) 3574,3548 ; L4.2@3558.48,3516.44 ccw(c3534.16,3548) 3574,3548 ; L4.2@3558.48,3516.44 ccw(c3534.16,3548) 3574,3548 ; L4.2@3574,3493.3 3574,3548 ; 3574,3548 ccw(c3613.84,3548) L4.2@3589.52,3516.44 ; 3574,3548 ccw(c3613.84,3548) L4.2@3589.52,3516.44 ; 3574,3548 ccw(c3613.84,3548) L4.2@3589.52,3516.44 ; 3574,3548 ccw(c3613.84,3548) L4.2@3589.52,3516.44
NetLED1_2: LED1.2 R8.1 | length 321.7
  Top Layer w8: LED1.2@2646,2544.53 LED1.2@2650.97,2539.56 2650.97,2594.97 2687,2631 2810,2631 2842,2663 2842,2701.69 R8.1@2841,2702.69
NetLED1_3: LED1.3 R11.1 | length 645.2
  Top Layer w8: LED1.3@2773.03,2484.44 2772.59,2484 2726,2484 2718,2492 2718,2568 2755,2605 2868,2605 2910,2647 R11.1@2910,2702.69 ; 2733.2,2484 ccw(c2733.2,2514.82) LED1.3@2755,2493.03 ; 2733.2,2484 ccw(c2733.2,2514.82) LED1.3@2755,2493.03 ; 2733.2,2484 ccw(c2733.2,2514.82) LED1.3@2755,2493.03 ; 2733.2,2484 ccw(c2733.2,2514.82) LED1.3@2755,2493.03 ; 2733.2,2484 ccw(c2733.2,2514.82) LED1.3@2755,2493.03 ; 2735.33,2484 cw(c2735.33,2456.19) LED1.3@2755,2475.86 ; 2735.33,2484 cw(c2735.33,2456.19) LED1.3@2755,2475.86 ; 2735.33,2484 cw(c2735.33,2456.19) LED1.3@2755,2475.86 ; 2735.33,2484 cw(c2735.33,2456.19) LED1.3@2755,2475.86 ; 2735.33,2484 cw(c2735.33,2456.19) LED1.3@2755,2475.86
NetLED1_4: LED1.4 R14.1 | length 521.4
  Top Layer w8: LED1.4@2773.03,2539.56 2849.56,2539.56 2974,2664 R14.1@2974,2702.69 ; LED1.4@2791.06,2530.97 cw(c2811.79,2510.25) 2811.79,2539.56 ; LED1.4@2791.06,2530.97 cw(c2811.79,2510.25) 2811.79,2539.56 ; LED1.4@2791.06,2530.97 cw(c2811.79,2510.25) 2811.79,2539.56 ; LED1.4@2791.06,2530.97 cw(c2811.79,2510.25) 2811.79,2539.56 ; LED1.4@2791.06,2530.97 cw(c2811.79,2510.25) 2811.79,2539.56 ; LED1.4@2791.06,2548.14 ccw(c2811.79,2568.87) 2811.79,2539.56 ; LED1.4@2791.06,2548.14 ccw(c2811.79,2568.87) 2811.79,2539.56 ; LED1.4@2791.06,2548.14 ccw(c2811.79,2568.87) 2811.79,2539.56 ; LED1.4@2791.06,2548.14 ccw(c2811.79,2568.87) 2811.79,2539.56 ; LED1.4@2791.06,2548.14 ccw(c2811.79,2568.87) 2811.79,2539.56
NetLED2_2: LED2.2 LED2.4 R18.2 | length 657.7
  Top Layer w10: LED2.4@3253.24,2491.32 3290.32,2491.32 3298,2499 3298,2525 3292.32,2530.68 ; LED2.2@3253.24,2530.68 3292.32,2530.68 ; R18.2@3563.68,2606 3521.68,2564 3325.63,2564 3292.32,2530.68 ; 3278.37,2491.32 cw(c3278.37,2512.51) 3263.39,2497.52 ccw(c3278.37,2512.51) 3278.37,2491.32 ; 3278.37,2491.32 ccw(c3278.37,2470.12) 3263.39,2485.11 cw(c3278.37,2470.12) 3278.37,2491.32 ; 3278.37,2530.68 cw(c3278.37,2551.88) 3263.39,2536.89 ccw(c3278.37,2551.88) 3278.37,2530.68 ; 3278.37,2530.68 ccw(c3278.37,2509.49) 3263.39,2524.48 cw(c3278.37,2509.49) 3278.37,2530.68 ; 3539.29,2581.6 cw(c3563.68,2557.21) 3563.68,2591.71 ccw(c3563.68,2557.21) 3539.29,2581.6 ; 3541.66,2583.98 ccw(c3520.63,2605.02) 3550.38,2605.02 cw(c3520.63,2605.02) 3541.66,2583.98
NetQ1_1: Q1.1 R6.2 R7.1 | length 1266.9
  Top Layer w8: Q1.1@3269.55,2767.92 cw(c3254.75,2753.12) 3275.69,2753.12 ; Q1.1@3275.08,2782.69 3275.69,2782.09 3275.69,2720 R6.2@3277.68,2718 3275.69,2716 R7.1@3275.69,2643 ; 3275.69,2756.05 cw(c3292.47,2756.05) Q1.1@3280.6,2767.92 ; R7.1@3265.57,2654.1 ccw(c3241.15,2678.52) 3275.69,2678.52 ; R7.1@3265.57,2654.1 ccw(c3241.15,2678.52) 3275.69,2678.52 ; R7.1@3265.57,2654.1 ccw(c3241.15,2678.52) 3275.69,2678.52 ; Q1.1@3265.55,2767.92 cw(c3241.1,2743.46) 3275.69,2743.46 ; Q1.1@3265.55,2767.92 cw(c3241.1,2743.46) 3275.69,2743.46 ; Q1.1@3265.55,2767.92 cw(c3241.1,2743.46) 3275.69,2743.46 ; Q1.1@3265.55,2767.92 cw(c3241.1,2743.46) 3275.69,2743.46 ; R6.2@3267.57,2706.9 cw(c3247.97,2687.3) 3275.69,2687.3 ; R6.2@3267.57,2706.9 cw(c3247.97,2687.3) 3275.69,2687.3 ; R6.2@3267.57,2706.9 cw(c3247.97,2687.3) 3275.69,2687.3 ; R6.2@3267.57,2706.9 cw(c3247.97,2687.3) 3275.69,2687.3 ; R6.2@3267.57,2706.9 cw(c3247.97,2687.3) 3275.69,2687.3 ; R6.2@3267.57,2729.1 ccw(c3247.97,2748.7) 3275.69,2748.7 ; R6.2@3267.57,2729.1 ccw(c3247.97,2748.7) 3275.69,2748.7 ; R6.2@3267.57,2729.1 ccw(c3247.97,2748.7) 3275.69,2748.7 ; R6.2@3267.57,2729.1 ccw(c3247.97,2748.7) 3275.69,2748.7 ; R6.2@3267.57,2729.1 ccw(c3247.97,2748.7) 3275.69,2748.7 ; 3275.69,2677.65 cw(c3317.05,2677.65) R6.2@3287.8,2706.9 ; 3275.69,2677.65 cw(c3317.05,2677.65) R6.2@3287.8,2706.9 ; 3275.69,2677.65 cw(c3317.05,2677.65) R6.2@3287.8,2706.9 ; 3275.69,2677.65 cw(c3317.05,2677.65) R6.2@3287.8,2706.9 ; 3275.69,2677.65 cw(c3317.05,2677.65) R6.2@3287.8,2706.9 ; 3275.69,2678.52 ccw(c3310.23,2678.52) R7.1@3285.8,2654.1 ; 3275.69,2678.52 ccw(c3310.23,2678.52) R7.1@3285.8,2654.1 ; 3275.69,2678.52 ccw(c3310.23,2678.52) R7.1@3285.8,2654.1 ; 3275.69,2696.97 cw(c3297.73,2696.97) R6.2@3282.14,2712.56 ; 3275.69,2696.97 cw(c3297.73,2696.97) R6.2@3282.14,2712.56 ; 3275.69,2696.97 cw(c3297.73,2696.97) R6.2@3282.14,2712.56 ; 3275.69,2696.97 cw(c3297.73,2696.97) R6.2@3282.14,2712.56 ; 3275.69,2696.97 cw(c3297.73,2696.97) R6.2@3282.14,2712.56 ; 3275.69,2739.03 ccw(c3297.73,2739.03) R6.2@3282.14,2723.44 ; 3275.69,2739.03 ccw(c3297.73,2739.03) R6.2@3282.14,2723.44 ; 3275.69,2739.03 ccw(c3297.73,2739.03) R6.2@3282.14,2723.44 ; 3275.69,2739.03 ccw(c3297.73,2739.03) R6.2@3282.14,2723.44 ; 3275.69,2739.03 ccw(c3297.73,2739.03) R6.2@3282.14,2723.44 ; 3275.69,2758.35 ccw(c3317.05,2758.35) R6.2@3287.8,2729.1 ; 3275.69,2758.35 ccw(c3317.05,2758.35) R6.2@3287.8,2729.1 ; 3275.69,2758.35 ccw(c3317.05,2758.35) R6.2@3287.8,2729.1 ; 3275.69,2758.35 ccw(c3317.05,2758.35) R6.2@3287.8,2729.1 ; 3275.69,2758.35 ccw(c3317.05,2758.35) R6.2@3287.8,2729.1 ; R7.1@3266.57,2658.1 ccw(c3244.56,2680.11) 3275.69,2680.11 cw(c3244.56,2680.11) R7.1@3266.57,2658.1 ; 3275.69,2684.94 ccw(c3313.64,2684.94) 3286.8,2658.1 cw(c3313.64,2684.94) 3275.69,2684.94
NetQ1_3: Q1.3 R12.1 | length 675
  Top Layer w8: R12.1@3192.31,2861 R12.1@3193.81,2862.5 ; R12.1@3192.31,2864 3208.25,2879.94 3253,2879.94 ; 3245.25,2879.94 3253,2879.94 ; Q1.3@3312.48,2879.94 Q1.3@3308.48,2879.94 3253,2879.94 ; R12.1@3195.4,2875.95 ccw(c3199.32,2893.68) 3212.16,2880.84 ; R12.1@3195.4,2875.95 ccw(c3199.32,2893.68) 3212.16,2880.84 ; R12.1@3195.4,2875.95 ccw(c3199.32,2893.68) 3212.16,2880.84 ; R12.1@3195.4,2875.95 ccw(c3199.32,2893.68) 3212.16,2880.84 ; R12.1@3195.4,2875.95 ccw(c3199.32,2893.68) 3212.16,2880.84 ; R12.1@3195.4,2875.95 ccw(c3199.32,2893.68) 3212.16,2880.84 ; R12.1@3197.12,2877.46 ccw(c3201.97,2891.03) 3212.16,2880.84 ; R12.1@3197.12,2877.46 ccw(c3201.97,2891.03) 3212.16,2880.84 ; R12.1@3197.12,2877.46 ccw(c3201.97,2891.03) 3212.16,2880.84 ; R12.1@3197.12,2877.46 ccw(c3201.97,2891.03) 3212.16,2880.84 ; R12.1@3197.12,2877.46 ccw(c3201.97,2891.03) 3212.16,2880.84 ; R12.1@3197.12,2877.46 ccw(c3201.97,2891.03) 3212.16,2880.84 ; R12.1@3206.49,2863.95 cw(c3226.3,2866.7) 3212.16,2880.84 ; R12.1@3206.49,2863.95 cw(c3226.3,2866.7) 3212.16,2880.84 ; R12.1@3206.49,2863.95 cw(c3226.3,2866.7) 3212.16,2880.84 ; R12.1@3206.49,2863.95 cw(c3226.3,2866.7) 3212.16,2880.84 ; R12.1@3206.49,2863.95 cw(c3226.3,2866.7) 3212.16,2880.84 ; R12.1@3206.49,2863.95 cw(c3226.3,2866.7) 3212.16,2880.84 ; R12.1@3206.56,2865.32 cw(c3225.87,2867.13) 3212.16,2880.84 ; R12.1@3206.56,2865.32 cw(c3225.87,2867.13) 3212.16,2880.84 ; R12.1@3206.56,2865.32 cw(c3225.87,2867.13) 3212.16,2880.84 ; R12.1@3206.56,2865.32 cw(c3225.87,2867.13) 3212.16,2880.84 ; R12.1@3206.56,2865.32 cw(c3225.87,2867.13) 3212.16,2880.84 ; R12.1@3206.56,2865.32 cw(c3225.87,2867.13) 3212.16,2880.84 ; 3289.62,2879.94 cw(c3289.62,2861.08) Q1.3@3302.96,2874.41 ; 3289.62,2879.94 ccw(c3289.62,2898.79) Q1.3@3302.96,2885.46 ; 3289.62,2879.94 cw(c3289.62,2861.08) Q1.3@3302.96,2874.41 ; 3289.62,2879.94 ccw(c3289.62,2898.79) Q1.3@3302.96,2885.46 ; 3289.62,2879.94 ccw(c3289.62,2898.79) Q1.3@3302.96,2885.46 ; 3289.62,2879.94 cw(c3289.62,2861.08) Q1.3@3302.96,2874.41 ; 3289.62,2879.94 ccw(c3289.62,2898.79) Q1.3@3302.96,2885.46 ; 3289.62,2879.94 cw(c3289.62,2861.08) Q1.3@3302.96,2874.41
NetQ2_1: Q2.1 R10.1 R13.2 | length 1319.2
  Top Layer w8: R10.1@3191.31,2929 3244,2929 3255,2918 3336,2918 3369,2885 3369,2863 3402,2830 3470.42,2830 ; R13.2@3476.2,2793.1 ccw(c3454.19,2815.11) 3485.31,2815.11 3470.42,2830 ; R13.2@3485.31,2782 3485.31,2717.3 Q2.1@3494.4,2708.21 ; R13.2@3486.32,2782 3486.32,2814.1 ; 3470.42,2830 3486.32,2814.1 ; R13.2@3476.2,2770.9 cw(c3454.19,2748.89) 3485.31,2748.89 ; R13.2@3476.2,2770.9 cw(c3454.19,2748.89) 3485.31,2748.89 ; R13.2@3476.2,2770.9 cw(c3454.19,2748.89) 3485.31,2748.89 ; R13.2@3476.2,2770.9 cw(c3454.19,2748.89) 3485.31,2748.89 ; R13.2@3476.2,2770.9 cw(c3454.19,2748.89) 3485.31,2748.89 ; R13.2@3477,2793.84 ccw(c3459.63,2814.1) 3486.32,2814.1 ; R13.2@3477,2793.84 ccw(c3459.63,2814.1) 3486.32,2814.1 ; R13.2@3477,2793.84 ccw(c3459.63,2814.1) 3486.32,2814.1 ; R13.2@3477,2793.84 ccw(c3459.63,2814.1) 3486.32,2814.1 ; 3485.31,2744.06 cw(c3523.28,2744.06) R13.2@3496.43,2770.9 ; 3485.31,2744.06 cw(c3523.28,2744.06) R13.2@3496.43,2770.9 ; 3485.31,2744.06 cw(c3523.28,2744.06) R13.2@3496.43,2770.9 ; 3485.31,2744.06 cw(c3523.28,2744.06) R13.2@3496.43,2770.9 ; 3485.31,2744.06 cw(c3523.28,2744.06) R13.2@3496.43,2770.9 ; 3485.31,2745.27 ccw(c3520.64,2745.27) Q2.1@3495.66,2720.3 ; 3485.31,2745.27 ccw(c3520.64,2745.27) Q2.1@3495.66,2720.3 ; 3485.31,2745.27 ccw(c3520.64,2745.27) Q2.1@3495.66,2720.3 ; 3485.31,2745.27 ccw(c3520.64,2745.27) Q2.1@3495.66,2720.3 ; 3485.31,2745.27 ccw(c3520.64,2745.27) Q2.1@3495.66,2720.3 ; R13.2@3485.31,2764.59 ccw(c3539.95,2764.59) Q2.1@3501.32,2725.95 ; R13.2@3485.31,2764.59 ccw(c3539.95,2764.59) Q2.1@3501.32,2725.95 ; R13.2@3485.31,2764.59 ccw(c3539.95,2764.59) Q2.1@3501.32,2725.95 ; R13.2@3485.31,2764.59 ccw(c3539.95,2764.59) Q2.1@3501.32,2725.95 ; R13.2@3485.31,2764.59 ccw(c3539.95,2764.59) Q2.1@3501.32,2725.95 ; 3486.32,2814.1 ccw(c3513,2814.1) R13.2@3495.63,2793.84 ; 3486.32,2814.1 ccw(c3513,2814.1) R13.2@3495.63,2793.84 ; 3486.32,2814.1 ccw(c3513,2814.1) R13.2@3495.63,2793.84 ; 3486.32,2814.1 ccw(c3513,2814.1) R13.2@3495.63,2793.84
NetQ2_3: Q2.3 R7.2 | length 584.2
  Top Layer w8: R7.2@3342.1,2648.79 3336.32,2643 3369.53,2609.79 Q2.3@3457,2609.79 ; 3433.39,2609.79 cw(c3433.39,2586.18) Q2.3@3450.08,2602.87 ; 3433.39,2609.79 ccw(c3433.39,2633.4) Q2.3@3450.08,2616.7 ; 3433.39,2609.79 cw(c3433.39,2586.18) Q2.3@3450.08,2602.87 ; 3433.39,2609.79 ccw(c3433.39,2633.4) Q2.3@3450.08,2616.7 ; 3433.39,2609.79 cw(c3433.39,2586.18) Q2.3@3450.08,2602.87 ; 3433.39,2609.79 ccw(c3433.39,2633.4) Q2.3@3450.08,2616.7 ; 3433.39,2609.79 ccw(c3433.39,2633.4) Q2.3@3450.08,2616.7 ; 3433.39,2609.79 cw(c3433.39,2586.18) Q2.3@3450.08,2602.87 ; 3433.39,2609.79 ccw(c3433.39,2633.4) Q2.3@3450.08,2616.7 ; 3433.39,2609.79 cw(c3433.39,2586.18) Q2.3@3450.08,2602.87 ; 3336.32,2627.71 cw(c3336.32,2590.79) 3362.42,2616.9 ccw(c3336.32,2590.79) 3336.32,2627.71 ; R7.2@3337.32,2631.71 cw(c3337.32,2606.86) 3354.88,2624.43 ccw(c3337.32,2606.86) R7.2@3337.32,2631.71 ; R7.2@3343.62,2646.02 ccw(c3368.54,2646.02) 3350.92,2628.39 cw(c3368.54,2646.02) R7.2@3343.62,2646.02 ; R7.2@3350.62,2642.02 ccw(c3382.79,2642.02) 3360.04,2619.27 cw(c3382.79,2642.02) R7.2@3350.62,2642.02 ; R7.2@3351.62,2646.02 ccw(c3395.86,2646.02) 3364.58,2614.74 cw(c3395.86,2646.02) R7.2@3351.62,2646.02